# EAGLE board single_channel (EAGLE 6.1)
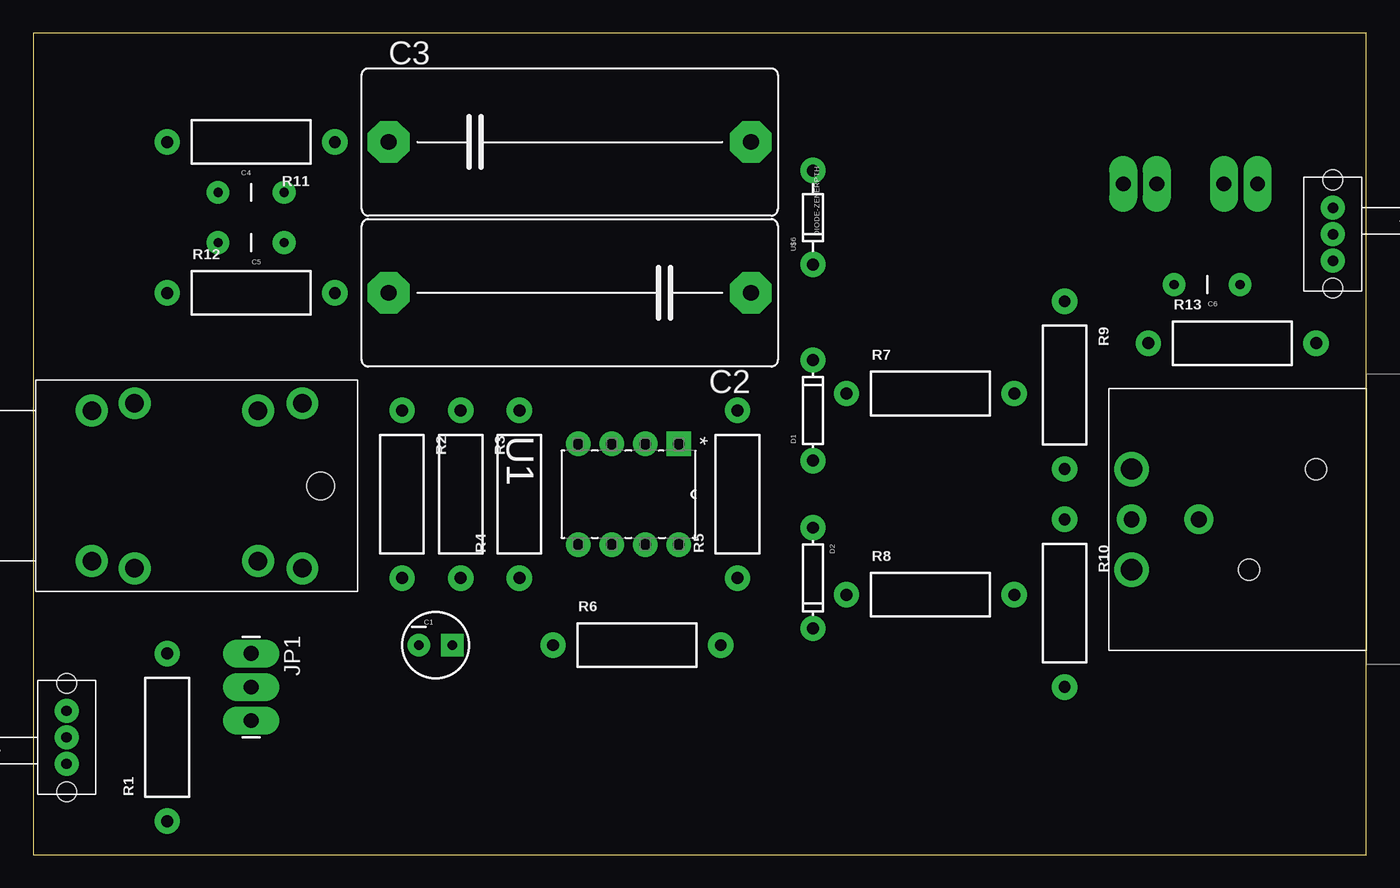
[diagram p0: board, top side]
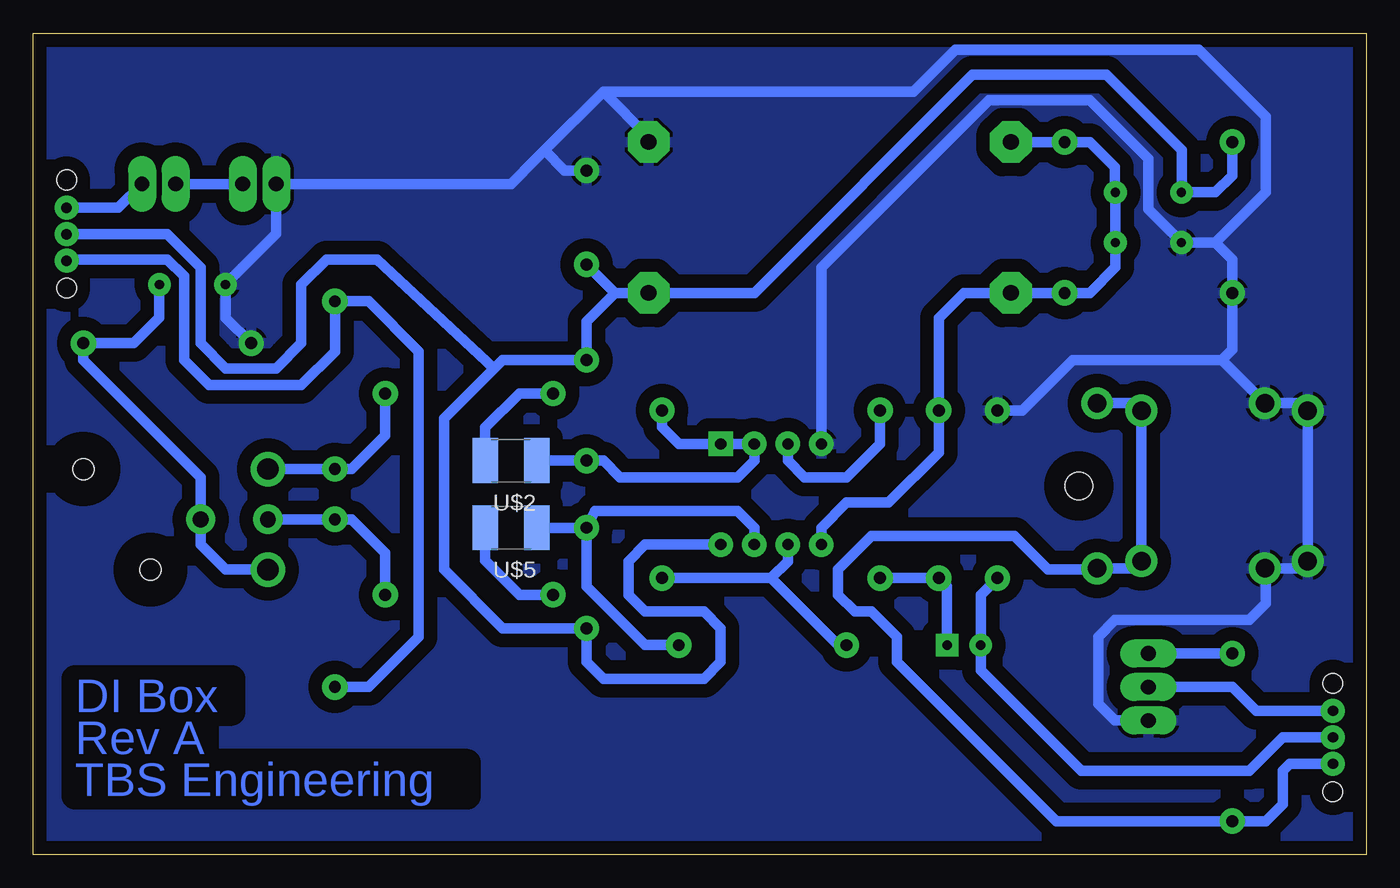
[diagram p1: board, bottom side, seen from below]

Size 100.97 x 62.23 mm. Coordinates in mm from the lower left corner, seen from the top.
Outline: 0,0 100.97,0 100.97,62.23 0,62.23 0,0
Copper layers (1*16): Top 0.035mm / dielectric 1.5mm / Bottom 0.035mm
Design rules: minimum track width 10mil, minimum drill 24mil, track to track 8mil, track to pad 8mil, pad to pad 8mil, via to via 8mil, smd to smd 8mil, copper to edge 40mil, drill to drill 8mil, minimum pad ring 20mil, minimum via ring 8mil, stop-mask expansion 4mil, vias tented up to drill 0mil, thermal gap 10mil

## Footprints (pad centres in the part's own frame; a part is rotated, then mirrored left to right if it is on the bottom)
CPOL-RADIAL-10UF-25V = drill 0.7 pad 1.651 square: 1 1.27,0 | drill 0.7 pad 1.651: 2 -1.27,0
C27.5B11 = drill 1.194 pad 3.15 octagon: 1 -13.716,0; 2 13.716,0
CAP-PTH-5MM = drill 0.7 pad 1.651: 1 -2.5,0; 2 2.5,0
DIODE-1N4148 = drill 0.9 pad 1.88: A -3.81,0; C 3.81,0
MHD = drill 1.4: 1 0,-5.7; 3 -12.6,-5.7; 4 0,5.7; 6 -12.6,5.7; 7 -3.25,-6.25; 9 -15.95,-6.25; 10 -3.25,6.25; 12 -15.95,6.25 | hole 2.1: -17.33,0
1X03_LONGPADS = drill 1.118 pad 1.88 long: 1 0,0; 2 2.54,0; 3 5.08,0
1X02_LONGPADS = drill 1.118 pad 1.88 long: 1 0,0; 2 2.54,0
AXIAL-0.5 = drill 0.9 pad 1.88: P$1 -6.35,0; P$2 6.35,0
DIP254P762X508-8 = drill 0.838 square: 1 -7.62,7.62 | drill 0.838: 2 -7.62,5.08; 3 -7.62,2.54; 4 -7.62,0; 5 0,0; 6 0,2.54; 7 0,5.08; 8 0,7.62
AC3MAH = drill 1.6: 1 3.81,-17.78; 2 -3.81,-17.78 | drill 1.2: 3 0,-17.78; G 0,-12.7 | hole 1.6: 3.81,-8.89; -3.81,-3.81
C1812 = smd 1.9 x 3.4: 1 -1.95,0; 2 1.95,0
SPDT-SLIDE = drill 0.787: 1 -2.007,0; 2 0,0; 3 2.007,0 | hole 1.499: -4.089,0; 4.115,0
DIODE-ZENER = drill 0.9: P$1 -3.556,0; P$2 3.556,0

## Placement (x,y rotation side)
C1  [CPOL-RADIAL-10UF-25V]  30.48,15.88 0 top
C2  [C27.5B11]  40.64,42.55 180 top
C3  [C27.5B11]  40.64,53.98 0 top
C4  [CAP-PTH-5MM]  16.51,50.16 0 top
C5  [CAP-PTH-5MM]  16.51,46.35 180 top
C6  [CAP-PTH-5MM]  88.9,43.18 180 top
D1  [DIODE-1N4148]  59.05,33.66 90 top
D2  [DIODE-1N4148]  59.05,20.95 270 top
DRILEGEND  [DRILEGEND]  -8.97,-4.22 0 top  (outside the outline)
J1  ACJMMHD  [MHD]  4.45,27.94 180 top
JP1  [1X03_LONGPADS]  16.51,15.24 270 top
JP2  [1X02_LONGPADS]  92.71,50.8 180 top
JP3  [1X02_LONGPADS]  85.09,50.8 180 top
R1  [AXIAL-0.5]  10.16,8.89 90 top
R2  [AXIAL-0.5]  27.94,27.3 270 top
R3  [AXIAL-0.5]  32.38,27.3 270 top
R4  [AXIAL-0.5]  36.83,27.3 90 top
R5  [AXIAL-0.5]  53.34,27.3 90 top
R6  [AXIAL-0.5]  45.72,15.88 0 top
R7  [AXIAL-0.5]  67.94,34.92 0 top
R8  [AXIAL-0.5]  67.94,19.68 0 top
R9  [AXIAL-0.5]  78.11,35.56 270 top
R10  [AXIAL-0.5]  78.11,19.05 270 top
R11  [AXIAL-0.5]  16.51,53.98 180 top
R12  [AXIAL-0.5]  16.51,42.55 0 top
R13  [AXIAL-0.5]  90.81,38.73 0 top
U1  TL072CP  [DIP254P762X508-8]  41.27,23.5 270 top
U$1  AC3M  [AC3MAH]  100.97,25.4 270 top
U$2  CAP  [C1812]  64.77,29.84 180 bottom
U$3  SPDT  [SPDT-SLIDE]  2.54,8.89 270 top
U$4  SPDT  [SPDT-SLIDE]  98.42,46.99 90 top
U$5  CAP  [C1812]  64.77,24.77 180 bottom
U$6  DIODE-ZENERPTH  [DIODE-ZENER]  59.05,48.26 90 top

## Library data of the parts
C1 C4-C6 D1 D2 R1-R13 U$6 = SparkFun
C2 C3 = capacitor-wima
DRILEGEND = drilegend
J1 U$1 = con-audio
JP1-JP3 = SparkFun-Connectors
U1 = ic-amplifiers; DESCRIPTION: OPERATIONAL AMPLIFIER; MPN: TL072CP; OC_FARNELL: 1106015; OC_NEWARK: 60K6988; PACKAGE: PDIP; SUPPLIER: Texas Instruments
U$2 U$5 = passive-capacitors
U$3 U$4 = switches

## Nets
GND: C3.2 C5.2 C6.2 J1.1 J1.4 J1.7 J1.10 JP1.3 JP3.2 R2.P$1 R12.P$1 R13.P$1 U1.4 U$6.P$2
N$1: JP1.1 R1.P$2
N$2: J1.3 J1.6 J1.9 J1.12 R1.P$1 U$3.3
N$4: JP1.2 U$3.1
N$5: C1.2 R2.P$2 U$3.2
N$6: C1.1 R3.P$2 R4.P$1
N$7: D1.A R5.P$2 U1.1 U1.2 U$2.1
N$8: R4.P$2 U1.3
N$9: R5.P$1 R6.P$1 U1.6
N$10: C2.2 C3.1 C4.2 C5.1 R3.P$1 R11.P$1 R12.P$2 U1.5
N$11: C2.1 C4.1 D1.C D2.C R11.P$2 U1.8 U$4.2 U$6.P$1
N$12: D2.A R6.P$2 U1.7 U$5.1
N$13: R8.P$2 R10.P$1 U$1.3
N$14: R9.P$1 R10.P$2 U$4.1
N$15: R7.P$2 R9.P$2 U$1.2
N$16: R7.P$1 U$2.2
N$17: R8.P$1 U$5.2
N$18: JP2.2 JP3.1
N$19: JP2.1 U$4.3
N$20: C6.1 R13.P$2 U$1.1 U$1.G

## Tracks (layer width: path | path; a pad name or v marks a point on that pad's centre or on a via)
GND
  Bottom 0.813: JP1.3 19.05,10.16 20.32,11.43 20.32,16.51 19.05,17.78 8.89,17.78 7.62,19.05 7.62,21.59 7.62,21.61 J1.10 5,21.69 J1.4 J1.1 5,34.19 J1.7 10.97,37.47 | R2.P$1 26.04,33.66 22.23,37.47 10.97,37.47 | R13.P$1 86.36,40.64 86.36,43.14 C6.2 82.55,47.03 JP3.2 65.41,50.8 | 65.41,50.8 65.15,50.8 | C5.2 13.97,46.35 | 13.97,46.35 11.43,46.35 | 11.43,46.35 10.16,45.09 R12.P$1 10.16,38.27 10.97,37.47 | 62.23,53.34 62.87,52.7 64.77,50.8 65.15,50.8 | 62.23,53.34 57.78,57.78 | 57.78,57.78 34.29,57.78 31.11,60.96 12.7,60.96 7.62,55.88 7.62,50.16 11.43,46.35 | 65.15,50.8 65.41,50.8 | U$6.P$2 60.71,51.82 62.23,53.34 | C3.2 54.36,54.36 57.78,57.78 | U1.4 41.27,44.45 28.57,57.15 20.95,57.15 16.51,52.7 16.51,48.9 13.97,46.35
  pour Bottom (isolate 1.016): 0,0 0,62.23 100.97,62.23 100.97,0
N$1
  Bottom 0.813: R1.P$2 JP1.1
N$2
  Bottom 0.813: U$3.3 5.82,6.88 6.35,6.35 6.35,3.81 7.62,2.54 R1.P$1 23.5,2.54 35.56,14.61 35.56,16.51 37.47,18.41 38.73,18.41 40.01,19.68 40.01,21.59 37.47,24.13 36.83,24.13 26.67,24.13 24.13,21.59 20.32,21.59 20.22,21.69 17.59,21.69 | J1.12 17.59,21.69 | 17.59,21.69 J1.6 J1.3 17.59,34.19 J1.9
N$4
  Bottom 0.813: U$3.1 8.36,10.9 10.16,12.7 JP1.2
N$5
  Bottom 0.813: U$3.2 6.35,8.89 8.89,6.35 21.59,6.35 29.21,13.97 C1.2 29.21,19.68 R2.P$2
N$6
  Bottom 0.813: R4.P$1 R3.P$2 31.75,20.32 C1.1
N$7
  Bottom 0.813: U$2.1 D1.A 57.78,29.84 56.52,28.57 47.62,28.57 46.35,29.84 U1.2 U1.1 52.07,31.11 53.34,32.38 R5.P$2
N$8
  Bottom 0.813: R4.P$2 36.83,31.11 39.37,28.57 42.55,28.57 43.81,29.84 U1.3
N$9
  Bottom 0.813: U1.6 43.81,22.23 45.09,20.95 | 45.09,20.95 R5.P$1 | R6.P$1 40.01,15.88 45.09,20.95
N$10
  Bottom 0.813: U1.5 41.27,24.77 39.37,26.67 36.2,26.67 32.38,30.48 R3.P$1 32.38,40.64 30.48,42.55 C2.2 R12.P$2 20.95,42.55 19.01,44.49 C5.1 C4.2 19.05,50.2 19.05,50.8 19.05,52.07 20.95,53.98 R11.P$1 C3.1
N$11
  Bottom 0.813: 66.04,36.83 65.41,37.47 D1.C 59.05,40.39 56.9,42.55 | 66.04,36.83 69.85,33.02 69.85,21.59 65.41,17.14 D2.C 59.05,14.61 57.78,13.34 50.16,13.34 48.9,14.61 48.9,17.14 50.16,18.41 54.61,18.41 55.88,19.68 55.88,22.23 54.61,23.5 U1.8 | 66.04,36.83 74.93,45.09 78.74,45.09 80.64,43.18 80.64,40.01 80.64,38.73 82.55,36.83 86.36,36.83 88.27,38.73 88.27,44.45 90.81,46.99 U$4.2 | R11.P$2 10.16,51.44 11.43,50.16 C4.1 13.97,50.2 13.97,53.34 19.68,59.05 29.84,59.05 46.35,42.55 C2.1 56.9,42.55 | 56.9,42.55 U$6.P$1
N$12
  Bottom 0.813: U$5.1 D2.A | D2.A 58.42,26.04 | 58.42,26.04 56.52,26.04 47.62,26.04 46.35,24.77 U1.7 | D2.A 58.42,26.04 | R6.P$2 54.61,15.88 59.05,20.32 D2.A
N$13
  Bottom 0.813: U$1.3 R10.P$1 76.83,25.4 74.3,22.86 R8.P$2
N$14
  Bottom 0.813: R10.P$2 75.56,12.7 71.75,16.51 71.75,38.1 75.56,41.91 R9.P$1 78.11,38.1 80.64,35.56 87.63,35.56 89.53,37.47 89.53,43.81 90.81,45.09 98.32,45.09 U$4.1
N$15
  Bottom 0.813: U$1.2 R9.P$2 76.83,29.21 74.3,31.75 R7.P$2
N$16
  Bottom 0.813: R7.P$1 64.14,34.92 66.72,32.34 U$2.2
N$17
  Bottom 0.813: R8.P$1 64.14,19.68 66.72,22.27 U$5.2
N$18
  Bottom 0.813: JP3.1 JP2.2
N$19
  Bottom 0.813: U$4.3 94.51,49 JP2.1
N$20
  Bottom 0.813: C6.1 91.4,40.68 93.34,38.73 R13.P$2 97.16,37.47 88.27,28.57 U$1.G 88.27,23.5 86.36,21.59 U$1.1

## Text on the board
Bottom: DI Box | Rev A | TBS Engineering